# EAGLE board ESP12 Altherma-Panel (EAGLE 9.6.2)
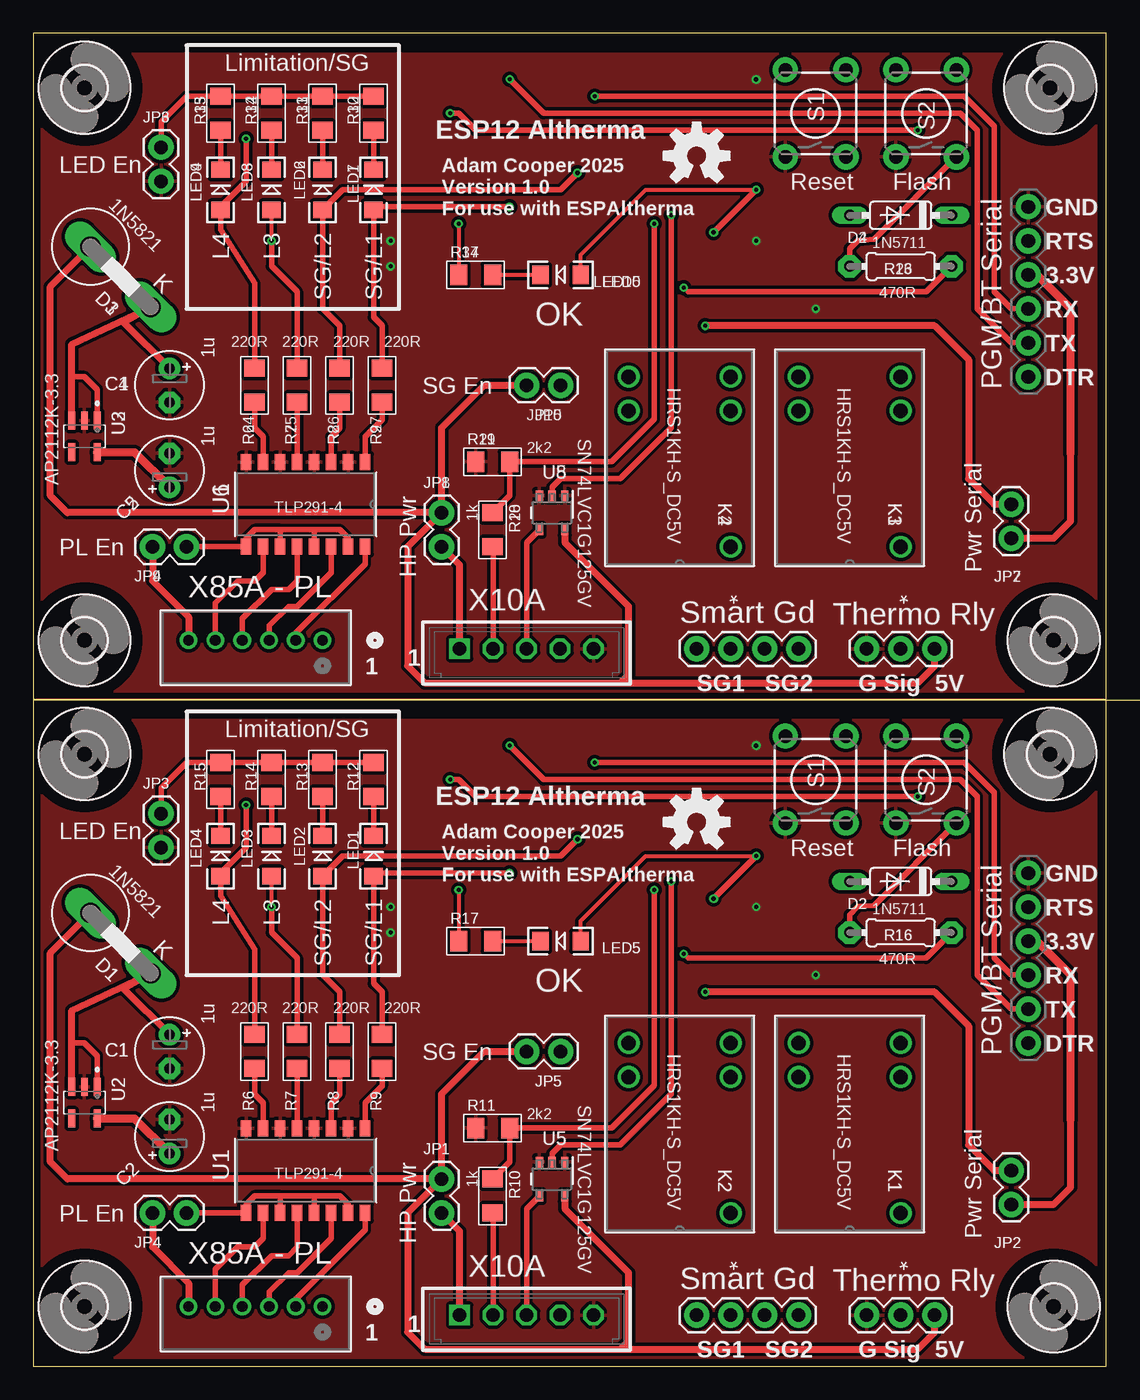
[diagram p0: board, top side]
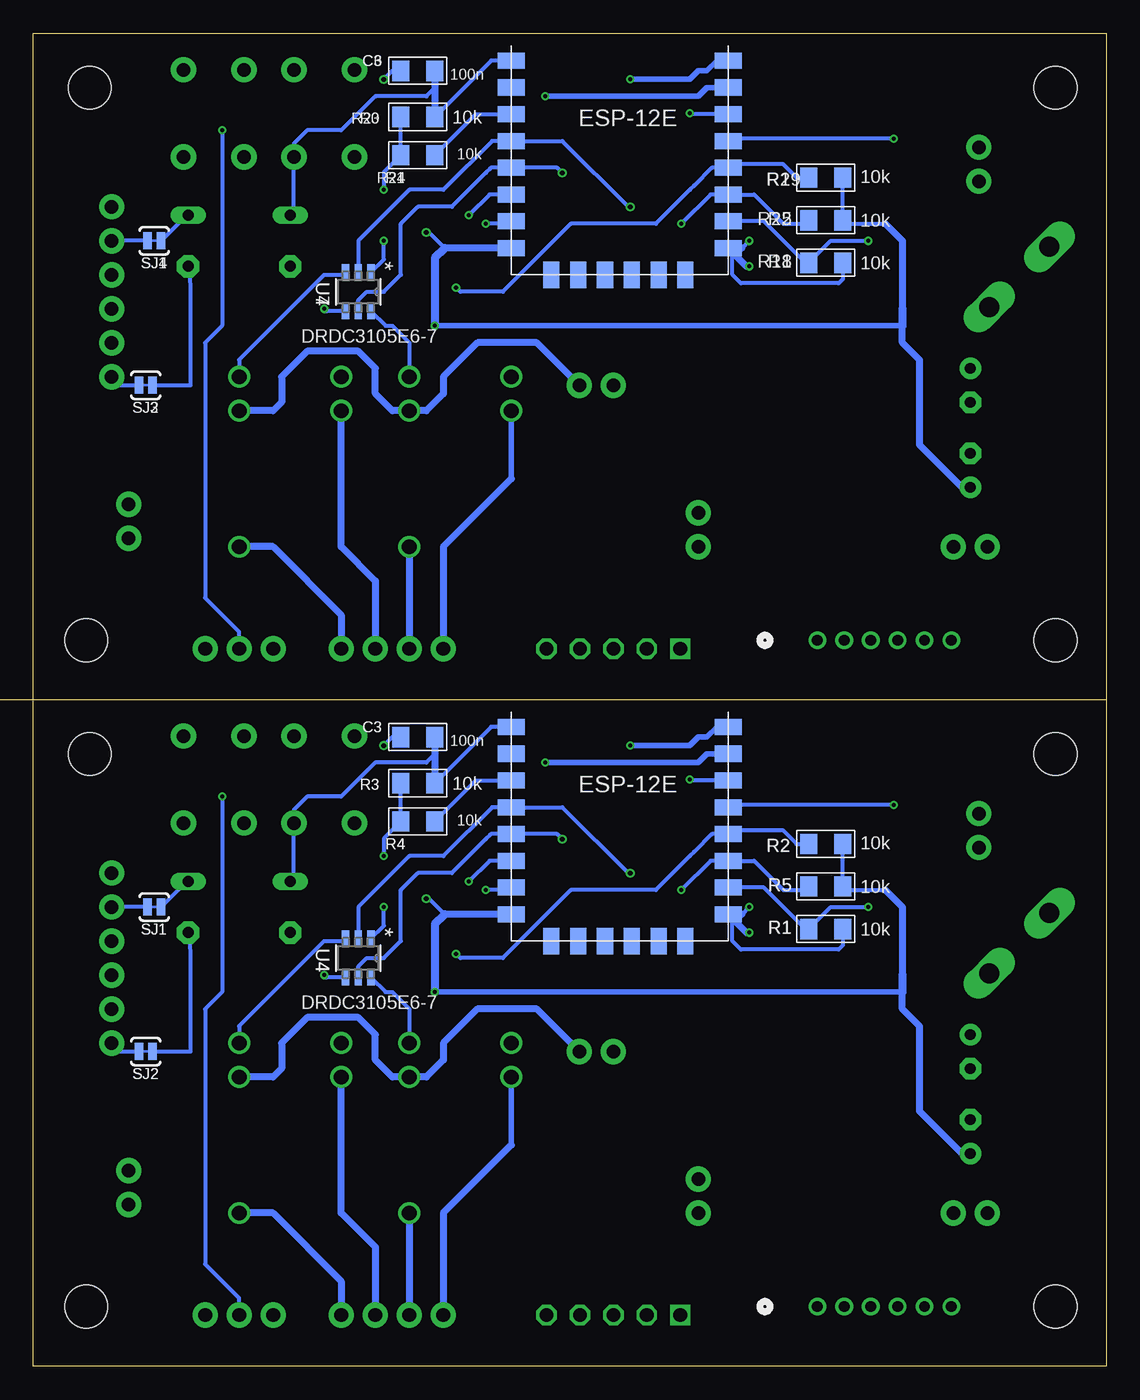
[diagram p1: board, bottom side, seen from below]

Size 80.14 x 99.56 mm. Coordinates in mm from the lower left corner, seen from the top.
Outline: 0,0 80.14,0 80.14,49.78 0,49.78 0,0
Outline: 0,49.78 80.14,49.78 80.14,99.56 0,99.56 0,49.78
Copper layers (1*16): Top 0.035mm / dielectric 1.5mm / Bottom 0.035mm
Design rules "Seeed Fusion_eagle_rule_v1.1": minimum track width 6mil, minimum drill 12mil, track to track 6mil, track to pad 6mil, pad to pad 6mil, via to via 6mil, smd to smd 0mil, copper to edge 10mil, drill to drill 10mil, minimum pad ring 10mil, minimum via ring 6mil, stop-mask expansion 2mil, vias tented up to drill 100mil, thermal gap 10mil
Milling: 1 lines

## Footprints (pad centres in the part's own frame; a part is rotated, then mirrored left to right if it is on the bottom)
E2,5-5 = drill 0.813 pad 1.6: + -1.27,0 | drill 0.813 pad 1.6 octagon: - 1.27,0
1206 = smd 1.27 x 1.524: 1 -1.27,0; 2 1.27,0
1X06-KIT = drill 1.016 pad 1.88: 1 0,0; 2 2.54,0; 3 5.08,0; 4 7.62,0; 5 10.16,0; 6 12.7,0
CONN_B06B-PASK_JST = drill 0.813 pad 1.321: 1 0,0; 2 2.007,0; 3 3.988,0; 4 5.994,0; 5 8.001,0; 6 10.008,0
B5B-EH-A = drill 1.016 square: 1 -5,0 | drill 1.016 octagon: 2 -2.5,0; 3 0,0; 4 2.5,0; 5 5,0
1X03 = drill 1.016 pad 1.88: 1 0,0; 2 2.54,0; 3 5.08,0
1X04 = drill 1.016 pad 1.88: 1 0,0; 2 2.54,0; 3 5.08,0; 4 7.62,0
DO201-15 = drill 1.499 long: A 0,0; C -6.35,0
DO35-7 = drill 0.813 long: A 3.81,0; C -3.81,0
3,2 = hole 3.2: 0,0
1X02 = drill 1.016 pad 1.88: 1 0,0; 2 2.54,0
HRS1KH-S_DC5V_MTC = drill 1.092 pad 1.6: 1 0,0; 2 0,-10.16; 3 0,-12.7; 4 7.62,-12.7; 5 7.62,-10.16
LED-1206 = smd 1.2 x 1.4: A -1.5,0; C 1.5,0
0204/7 = drill 0.813 pad 1.676 octagon: 1 -3.81,0; 2 3.81,0
TACTILE-PTH = drill 1.016 pad 1.88: 1 -3.251,2.261; 2 3.251,2.261; 3 -3.251,-2.261; 4 3.251,-2.261
SJ_2S-TRACE = smd 0.635 x 1.27: 1 -0.508,0; 2 0.508,0
ESP8266-ESP12E0-NKE = smd 2 x 1.2: 1 -7.62,5.84; 2 -7.62,3.84; 3 -7.62,1.84; 4 -7.62,-0.16; 5 -7.62,-2.16; 6 -7.62,-4.16; 7 -7.62,-6.16; 8 -7.62,-8.16; 9 8.58,-8.16; 10 8.58,-6.16; 11 8.58,-4.16; 12 8.58,-2.16; 13 8.58,-0.16; 14 8.58,1.84; 15 8.58,3.84; 16 8.58,5.84 | smd 1.2 x 2: 17 -4.62,-10.16; 18 -2.62,-10.16; 19 -0.62,-10.16; 20 1.38,-10.16; 21 3.38,-10.16; 22 5.38,-10.16
SO16_TOS = smd 1.194 x 0.813: 1 -3.15,4.445; 2 -3.15,3.175; 3 -3.15,1.905; 4 -3.15,0.635; 5 -3.15,-0.635; 6 -3.15,-1.905; 7 -3.15,-3.175; 8 -3.15,-4.445; 9 3.15,-4.445; 10 3.15,-3.175; 11 3.15,-1.905; 12 3.15,-0.635; 13 3.15,0.635; 14 3.15,1.905; 15 3.15,3.175; 16 3.15,4.445
SOT95P285X140-5N = smd 1.35 x 0.6: 1 -1.185,0.95; 2 -1.185,0; 3 -1.185,-0.95; 4 1.185,-0.95; 5 1.185,0.95
SOT26-DI_DIO-M = smd 1.206 x 0.559: 1 -1.454,0.95; 2 -1.454,0; 3 -1.454,-0.95; 4 1.454,-0.95; 5 1.454,0; 6 1.454,0.95
DBV0005A_L = smd 0.8 x 0.55: 1 -1.275,0.95; 2 -1.275,0; 3 -1.275,-0.95; 4 1.275,-0.95; 5 1.275,0.95

## Placement (x,y rotation side)
C1  1u  [E2,5-5]  10.16,23.5 270 top
C2  1u  [E2,5-5]  10.16,17.14 90 top
C3  100n  [1206]  51.44,46.99 180 bottom
C4  1u  [E2,5-5]  10.16,73.27 270 top
C5  1u  [E2,5-5]  10.16,66.92 90 top
C6  100n  [1206]  51.44,96.77 180 bottom
CON1  PGM/BT Serial  [1X06-KIT]  74.3,36.83 270 top
CON2  X85A - PL  [CONN_B06B-PASK_JST]  21.59,4.45 180 top
CON3  X10A  [B5B-EH-A]  36.83,3.81 0 top
CON4  PGM/BT Serial  [1X06-KIT]  74.3,86.61 270 top
CON5  Thermo Rly  [1X03]  62.23,3.81 0 top
CON6  Thermo Rly  [1X03]  62.23,53.59 0 top
CON7  X10A  [B5B-EH-A]  36.83,53.59 0 top
CON8  X85A - PL  [CONN_B06B-PASK_JST]  21.59,54.22 180 top
CONN1  SG  [1X04]  49.53,53.59 0 top
CONN4  SG  [1X04]  49.53,3.81 0 top
D1  1N5821  [DO201-15]  4.26,33.84 135 top
D2  1N5711  [DO35-7]  64.77,36.2 180 top
D3  1N5821  [DO201-15]  4.26,83.62 135 top
D4  1N5711  [DO35-7]  64.77,85.97 180 top
H1  MOUNT-HOLE3.2  [3,2]  75.93,45.72 0 top
H2  MOUNT-HOLE3.2  [3,2]  3.81,4.45 0 top
H3  MOUNT-HOLE3.2  [3,2]  76.2,4.45 0 top
H4  MOUNT-HOLE3.2  [3,2]  3.81,45.72 0 top
H5  MOUNT-HOLE3.2  [3,2]  75.93,95.5 0 top
H6  MOUNT-HOLE3.2  [3,2]  3.81,54.22 0 top
H7  MOUNT-HOLE3.2  [3,2]  3.81,95.5 0 top
H8  MOUNT-HOLE3.2  [3,2]  76.2,54.22 0 top
JP1  HP Pwr  [1X02]  30.48,13.97 270 top
JP2  Pwr Serial  [1X02]  73.03,12.06 90 top
JP3  LED En  [1X02]  9.53,41.27 270 top
JP4  PL En  [1X02]  8.89,11.43 0 top
JP5  SG En  [1X02]  39.37,23.5 180 top
JP6  LED En  [1X02]  9.53,91.05 270 top
JP7  Pwr Serial  [1X02]  73.03,61.84 90 top
JP8  HP Pwr  [1X02]  30.48,63.75 270 top
JP9  PL En  [1X02]  8.89,61.21 0 top
JP10  SG En  [1X02]  39.37,73.27 180 top
K1  HRS1KH-S_DC5V  [HRS1KH-S_DC5V_MTC]  64.77,11.43 180 top
K2  HRS1KH-S_DC5V  [HRS1KH-S_DC5V_MTC]  52.07,11.43 180 top
K3  HRS1KH-S_DC5V  [HRS1KH-S_DC5V_MTC]  64.77,61.21 180 top
K4  HRS1KH-S_DC5V  [HRS1KH-S_DC5V_MTC]  52.07,61.21 180 top
LED1  [LED-1206]  25.4,38.1 90 top
LED2  [LED-1206]  21.59,38.1 90 top
LED3  [LED-1206]  17.78,38.1 90 top
LED4  [LED-1206]  13.97,38.1 90 top
LED5  [LED-1206]  39.37,31.75 180 top
LED6  [LED-1206]  21.59,87.88 90 top
LED7  [LED-1206]  25.4,87.88 90 top
LED8  [LED-1206]  17.78,87.88 90 top
LED9  [LED-1206]  13.97,87.88 90 top
LED10  [LED-1206]  39.37,81.53 180 top
LOGO1  OSHW-LOGOM  [OSHW-LOGO-M]  49.53,40.64 0 top
LOGO2  OSHW-LOGOM  [OSHW-LOGO-M]  49.53,90.42 0 top
R1  10k  [1206]  20.95,32.66 180 bottom
R2  10k  [1206]  20.95,39.01 0 bottom
R3  10k  [1206]  51.44,43.55 180 bottom
R4  10k  [1206]  51.44,40.69 180 bottom
R5  10k  [1206]  20.95,35.83 180 bottom
R6  220R  [1206]  16.51,23.5 90 top
R7  220R  [1206]  19.68,23.5 90 top
R8  220R  [1206]  22.86,23.5 90 top
R9  220R  [1206]  26.04,23.5 90 top
R10  1k  [1206]  34.29,12.7 270 top
R11  2k2  [1206]  34.29,17.78 0 top
R12  180R  [1206]  25.4,43.81 270 top
R13  180R  [1206]  21.59,43.81 270 top
R14  180R  [1206]  17.78,43.81 270 top
R15  180R  [1206]  13.97,43.81 270 top
R16  470R  [0204/7]  64.77,32.38 0 top
R17  180R  [1206]  33.02,31.75 0 top
R18  10k  [1206]  20.95,82.43 180 bottom
R19  10k  [1206]  20.95,88.78 0 bottom
R20  10k  [1206]  51.44,93.32 180 bottom
R21  10k  [1206]  51.44,90.47 180 bottom
R22  10k  [1206]  20.95,85.61 180 bottom
R23  470R  [0204/7]  64.77,82.16 0 top
R24  220R  [1206]  16.51,73.27 90 top
R25  220R  [1206]  19.68,73.27 90 top
R26  220R  [1206]  22.86,73.27 90 top
R27  220R  [1206]  26.04,73.27 90 top
R28  1k  [1206]  34.29,62.48 270 top
R29  2k2  [1206]  34.29,67.56 0 top
R30  180R  [1206]  25.4,93.59 270 top
R31  180R  [1206]  21.59,93.59 270 top
R32  180R  [1206]  17.78,93.59 270 top
R33  180R  [1206]  13.97,93.59 270 top
R34  180R  [1206]  33.02,81.53 0 top
S1  Reset  [TACTILE-PTH]  58.42,43.81 90 top
S2  Flash  [TACTILE-PTH]  66.67,43.81 90 top
S3  Reset  [TACTILE-PTH]  58.42,93.59 90 top
S4  Flash  [TACTILE-PTH]  66.67,93.59 90 top
SJ1  SOLDERJUMPERTRACE  [SJ_2S-TRACE]  71.12,34.29 180 bottom
SJ2  SOLDERJUMPERTRACE  [SJ_2S-TRACE]  71.75,23.5 180 bottom
SJ3  SOLDERJUMPERTRACE  [SJ_2S-TRACE]  71.75,73.27 180 bottom
SJ4  SOLDERJUMPERTRACE  [SJ_2S-TRACE]  71.12,84.07 180 bottom
SJR1  [ESP8266-ESP12E0-NKE]  36.83,41.91 0 bottom
SJR2  [ESP8266-ESP12E0-NKE]  36.83,91.69 0 bottom
U1  TLP291-4  [SO16_TOS]  20.32,14.61 270 top
U2  AP2112K-3.3  [SOT95P285X140-5N]  3.81,19.68 270 top
U3  AP2112K-3.3  [SOT95P285X140-5N]  3.81,69.46 270 top
U4  DRDC3105E6-7  [SOT26-DI_DIO-M]  55.88,30.48 270 bottom
U5  SN74LVC1G125GV  [DBV0005A_L]  38.73,13.97 270 top
U6  TLP291-4  [SO16_TOS]  20.32,64.38 270 top
U7  DRDC3105E6-7  [SOT26-DI_DIO-M]  55.88,80.26 270 bottom
U8  SN74LVC1G125GV  [DBV0005A_L]  38.73,63.75 270 top

## Library data of the parts
C1-C6 CON1 CON4 D1-D4 H1-H8 LED1-LED10 LOGO1 LOGO2 R1-R34 S1-S4 SJ1-SJ4 = Master 2016
CON2 CON8 = conn-jst-pa6; COPYRIGHT: Copyright (C) 2025 Ultra Librarian. All rights reserved.; MANUFACTURER_PART_NUMBER: B06B-PASK(LF)(SN); MFR_NAME: JST
CON3 CON7 = con-jst-eh
CON5 CON6 = SparkFun-Connectors; PROD_ID: XXX-00000
CONN1 CONN4 = SparkFun-Connectors; PROD_ID: CONN-09696
JP1-JP10 = SparkFun-Passives
K1-K4 = HRS1KH-S Relay; COPYRIGHT: Copyright (C) 2024 Ultra Librarian. All rights reserved.; MANUFACTURER_PART_NUMBER: HRS1KH-S DC5V; MFR_NAME: Multicomp
SJR1 SJR2 = esp12e
U1 U6 = TLP291-4; COPYRIGHT: Copyright (C) 2024 Ultra Librarian. All rights reserved.; MANUFACTURER_PART_NUMBER: TLP291-4(GB-TP,E); MFR_NAME: Toshiba Electronic Devices & Storage Corp.
U2 U3 = AP2112K-3.3TRG1; AVAILABILITY: Unavailable; DESCRIPTION: Linear Voltage Regulator IC 1 Output 600mA SOT-25; MF: Diodes Inc.; MP: AP2112K-3.3TRG1; PACKAGE: SOT-753 Diodes Inc.; PRICE: None
U4 U7 = DRDC3105E6; COPYRIGHT: Copyright (C) 2024 Ultra Librarian. All rights reserved.; MANUFACTURER_PART_NUMBER: DRDC3105E6-7; MFR_NAME: Diodes Inc
U5 U8 = 74LVC1G125GV; COPYRIGHT: Copyright (C) 2024 Ultra Librarian. All rights reserved.; MANUFACTURER_PART_NUMBER: SN74LVC1G125DBVR; MFR_NAME: Texas Instruments; REFDES: RefDes; TYPE: TYPE

## Nets
5V: CON5.3 D1.A JP1.1 JP5.2 U5.5
5V1: CON6.3 D3.A JP8.1 JP10.2 U8.5
5V_HP: CON3.1 JP1.2
5V_HP1: CON7.1 JP8.2
GND: C1.- C2.- C3.2 CON1.1 CON3.5 CON5.1 JP3.2 R1.1 R11.1 S1.1 S2.1 SJR1.9 U1.2 U1.4 U1.6 U1.8 U2.2 U4.1 U4.4 U5.1 U5.3
GND1: C4.- C5.- C6.2 CON4.1 CON6.1 CON7.5 JP6.2 R18.1 R29.1 S3.1 S4.1 SJR2.9 U3.2 U6.2 U6.4 U6.6 U6.8 U7.1 U7.4 U8.1 U8.3
GPIO0: R2.1 R16.2 SJ2.1 SJR1.12
GPIO1: LED9.A R24.2 SJR2.13
GPIO2: R5.2 R17.1 SJR1.11
GPIO3: CON6.2 SJR2.14
GPIO4: LED4.A R6.2 SJR1.13
GPIO5: CON5.2 SJR1.14
GPIO6: SJR2.6 U8.2
GPIO7: R28.1 R29.2 SJR2.7
GPIO8: LED6.A R26.2 SJR2.5 U7.5
GPIO9: R19.1 R23.2 SJ3.1 SJR2.12
GPIO10: R22.2 R34.1 SJR2.11
GPIO11: LED7.A R27.2 SJR2.4 U7.2
GPIO12: SJR1.6 U5.2
GPIO13: R10.1 R11.2 SJR1.7
GPIO14: LED2.A R8.2 SJR1.5 U4.5
GPIO15: LED3.A R1.2 R7.2 SJR1.10
GPIO16: LED1.A R9.2 SJR1.4 U4.2
GPIO17: LED8.A R18.2 R25.2 SJR2.10
N$1: R16.1 S2.3
N$2: R9.1 U1.1
N$3: CON2.3 U1.14
N$4: JP3.1 R12.1 R13.1 R14.1 R15.1
N$5: CON1.2 SJ1.2
N$6: JP5.1 K1.2 K2.2
N$7: LED3.C R14.2
N$8: C1.+ D1.C U2.1 U2.3
N$9: CON1.3 JP2.1
N$10: CON1.6 SJ2.2
N$11: CON2.5 U1.10
N$12: CON2.4 U1.12
N$13: CON2.2 U1.16
N$14: D2.C SJ1.1
N$15: LED4.C R15.2
N$16: R4.1 SJR1.3
N$17: R6.1 U1.7
N$18: R8.1 U1.3
N$19: R7.1 U1.5
N$20: CON3.3 U5.4
N$21: CON3.2 R10.2
N$22: CONN4.1 K2.5
N$23: CONN4.2 K2.1
N$24: CONN4.3 K1.5
N$25: CONN4.4 K1.1
N$26: K1.3 U4.3
N$27: CON2.6 JP4.1
N$28: LED5.C R17.2
N$29: K2.3 U4.6
N$30: R21.1 SJR2.3
N$31: R23.1 S4.3
N$32: C4.+ D3.C U3.1 U3.3
N$33: CON4.3 JP7.1
N$34: CON4.6 SJ3.2
N$35: CON4.2 SJ4.2
N$36: D4.C SJ4.1
N$37: CON8.5 U6.10
N$38: CON8.4 U6.12
N$39: LED1.C R12.2
N$40: LED2.C R13.2
N$41: CON8.3 U6.14
N$42: CON8.2 U6.16
N$43: R24.1 U6.7
N$44: R27.1 U6.1
N$45: R26.1 U6.3
N$46: R25.1 U6.5
N$47: CON7.3 U8.4
N$48: CON7.2 R28.2
N$49: CONN1.1 K4.5
N$50: CONN1.3 K3.5
N$51: CONN1.2 K4.1
N$52: CONN1.4 K3.1
N$53: K3.3 U7.3
N$54: K4.3 U7.6
N$55: JP6.1 R30.1 R31.1 R32.1 R33.1
N$56: LED8.C R32.2
N$57: LED9.C R33.2
N$58: LED7.C R30.2
N$59: LED6.C R31.2
N$60: CON8.6 JP9.1
N$61: JP10.1 K3.2 K4.2
N$62: LED10.C R34.2
RST: C3.1 D2.A R3.1 S1.3 SJR1.1
RST1: C6.1 D4.A R20.1 S3.3 SJR2.1
RXD: CON1.4 SJR1.15
RXD1: CON4.4 SJR2.15
TXD: CON1.5 SJR1.16
TXD1: CON4.5 SJR2.16
VCC: C2.+ JP2.2 LED5.A R2.2 R3.2 R4.2 R5.1 SJR1.8 U2.5
VCC1: C5.+ JP7.2 LED10.A R19.2 R20.2 R21.2 R22.1 SJR2.8 U3.5
X85_GND: JP4.2 U1.9 U1.11 U1.13 U1.15
X85_GND1: JP9.2 U6.9 U6.11 U6.13 U6.15

## Tracks (layer width: path | path; a pad name or v marks a point on that pad's centre or on a via)
5V
  Top 0.508: JP1.1 2.54,13.97 1.27,15.24 1.27,30.85 D1.A | JP1.1 27.94,11.43 27.94,2.54 29.21,1.27 43.81,1.27 | 43.81,1.27 44.45,1.91 44.45,6.99 39.69,11.75 U5.5 | 43.81,1.27 66.04,1.27 67.31,2.54 CON5.3 | JP1.1 30.48,20.32 33.66,23.5 JP5.2
5V1
  Top 0.508: JP8.1 2.54,63.75 1.27,65.02 1.27,80.63 D3.A | JP8.1 27.94,61.21 27.94,52.32 29.21,51.05 43.81,51.05 | 43.81,51.05 44.45,51.68 44.45,56.76 39.69,61.53 U8.5 | 43.81,51.05 66.04,51.05 67.31,52.32 CON6.3 | JP8.1 30.48,70.1 33.66,73.27 JP10.2
5V_HP
  Top 0.508: CON3.1 31.83,10.08 JP1.2
5V_HP1
  Top 0.508: CON7.1 31.83,59.86 JP8.2
GND  (via drill 0.3 pad 0.61, 0.35)
  Bottom 0.305: SJR1.9 27.94,33.75 27.94,31.75 27.3,31.11 20,31.11 19.68,31.43 R1.1 | 27.21,33.75 v26.67,34.29 | 26.89,32.38 v26.67,32.38 | U4.1 53.98,32.89 v53.98,34.29 | U4.4 58.24,29.03 v58.42,29.21 | C3.2 53.34,46.99 v53.98,46.35
  Bottom 0.508: 27.94,33.75 27.21,33.75 | SJR1.9 26.89,32.38
  pour Top (isolate 0.254): 0.64,0.64 0.64,48.26 79.38,48.26 79.38,0.64
GND1  (via drill 0.3 pad 0.61, 0.35)
  Bottom 0.305: SJR2.9 27.94,83.53 27.94,81.53 27.3,80.89 20,80.89 19.68,81.21 R18.1 | 27.21,83.53 v26.67,84.07 | 26.89,82.16 v26.67,82.16 | U7.1 53.98,82.67 v53.98,84.07 | U7.4 58.24,78.81 v58.42,78.99 | C6.2 53.34,96.77 v53.98,96.13
  Bottom 0.508: 27.94,83.53 27.21,83.53 | SJR2.9 26.89,82.16
  pour Top (isolate 0.254): 0.64,50.41 0.64,98.04 79.38,98.04 79.38,50.41
GPIO0  (via drill 0.3 pad 0.61)
  Top 0.305: v48.58,30.8 48.9,30.48
  Top 0.406: R16.2 66.67,30.48 48.9,30.48
  Bottom 0.305: R2.1 23.13,39.01 24.13,40.01 28,40.01 SJR1.12 29.46,39.75 30.8,38.42 31.11,38.1 33.66,35.56 40.01,35.56 45.09,30.48 48.26,30.48 v48.58,30.8 | R16.2 68.43,30.96 68.43,23.5 SJ2.1
GPIO1  (via drill 0.3 pad 0.61)
  Top 0.305: 13.97,86.61 LED9.A
  Top 0.406: v15.88,91.69 15.88,88.51 13.97,86.61 | R24.2 16.51,80.89 13.97,84.89 LED9.A
  Bottom 0.305: v15.88,91.69 28.09,91.69 SJR2.13
GPIO2  (via drill 0.3 pad 0.61)
  Top 0.305: v31.75,35.56 R17.1
  Bottom 0.305: R5.2 22.5,35.56 24.13,35.56 26.32,37.75 SJR1.11 29.56,37.75 v31.75,35.56
GPIO3  (via drill 0.3 pad 0.61)
  Top 0.406: v31.11,93.59 31.75,93.59 33.02,92.32 v66.04,92.32
  Bottom 0.305: SJR2.14 31.18,93.53 v31.11,93.59 | v66.04,92.32 66.04,77.72 67.31,76.45 67.31,57.4 64.77,54.86 CON6.2
GPIO4  (via drill 0.3 pad 0.61)
  Top 0.305: 13.97,36.83 LED4.A
  Top 0.406: v15.88,41.91 15.88,38.73 13.97,36.83 | R6.2 16.51,31.11 13.97,35.11 LED4.A
  Bottom 0.305: v15.88,41.91 28.09,41.91 SJR1.13
GPIO5  (via drill 0.3 pad 0.61)
  Top 0.406: v31.11,43.81 31.75,43.81 33.02,42.55 v66.04,42.55
  Bottom 0.305: SJR1.14 31.18,43.75 v31.11,43.81 | v66.04,42.55 66.04,27.94 67.31,26.67 67.31,7.62 64.77,5.08 CON5.2
GPIO6  (via drill 0.3 pad 0.61)
  Top 0.406: U8.2 38.73,65.65 39.37,66.29 43.81,66.29 47.62,70.1 v47.62,85.97
  Bottom 0.305: SJR2.6 46.07,87.53 v47.62,85.97
GPIO7  (via drill 0.3 pad 0.61)
  Top 0.406: R28.1 35.56,65.02 R29.2 43.18,67.56 46.35,70.73 v46.35,85.34
  Bottom 0.305: SJR2.7 44.64,85.34 v46.35,85.34
GPIO8  (via drill 0.35)
  Top 0.406: R26.2 22.86,77.72 21.59,78.99 LED6.A 23.09,87.88 39.37,87.88 v40.64,89.15
  Bottom 0.305: U7.5 55.88,79.62 55.24,80.26 53.98,80.26 52.7,81.53 52.7,85.34 51.44,86.61 48.9,86.61 46.35,89.15 46.04,89.47 45.98,89.53 SJR2.5 41.02,89.53 v40.64,89.15
GPIO9  (via drill 0.3 pad 0.61)
  Top 0.305: v48.58,80.58 48.9,80.26
  Top 0.406: R23.2 66.67,80.26 48.9,80.26
  Bottom 0.305: R19.1 23.13,88.78 24.13,89.78 28,89.78 SJR2.12 29.46,89.53 30.8,88.2 31.11,87.88 33.66,85.34 40.01,85.34 45.09,80.26 48.26,80.26 v48.58,80.58 | R23.2 68.43,80.74 68.43,73.27 SJ3.1
GPIO10  (via drill 0.3 pad 0.61)
  Top 0.305: v31.75,85.34 R34.1
  Bottom 0.305: R22.2 22.5,85.34 24.13,85.34 26.32,87.53 SJR2.11 29.56,87.53 v31.75,85.34
GPIO11  (via drill 0.35)
  Top 0.305: LED7.A 25.63,86.61
  Top 0.406: 25.63,86.61 v35.56,86.61 | R27.2 26.04,77.72 25.4,78.35 LED7.A
  Bottom 0.305: U7.2 55.88,84.07 52.07,87.88 49.53,87.88 45.88,91.53 SJR2.4 40.64,91.53 35.72,86.61 v35.56,86.61
GPIO12  (via drill 0.3 pad 0.61)
  Top 0.406: U5.2 38.73,15.88 39.37,16.51 43.81,16.51 47.62,20.32 v47.62,36.2
  Bottom 0.305: SJR1.6 46.07,37.75 v47.62,36.2
GPIO13  (via drill 0.3 pad 0.61)
  Top 0.406: R10.1 35.56,15.24 R11.2 43.18,17.78 46.35,20.95 v46.35,35.56
  Bottom 0.305: SJR1.7 44.64,35.56 v46.35,35.56
GPIO14  (via drill 0.35)
  Top 0.406: R8.2 22.86,27.94 21.59,29.21 LED2.A 23.09,38.1 39.37,38.1 v40.64,39.37
  Bottom 0.305: U4.5 55.88,29.84 55.24,30.48 53.98,30.48 52.7,31.75 52.7,35.56 51.44,36.83 48.9,36.83 46.35,39.37 46.04,39.69 45.98,39.75 SJR1.5 41.02,39.75 v40.64,39.37
GPIO15  (via drill 0.3 pad 0.61)
  Top 0.305: v17.78,34.29 LED3.A
  Top 0.406: R7.2 19.68,30.48 17.78,32.38 v17.78,34.29
  Bottom 0.305: SJR1.10 25.59,35.75 22.5,32.66 R1.2 20.59,34.29 v17.78,34.29
GPIO16  (via drill 0.35)
  Top 0.305: LED1.A 25.63,36.83
  Top 0.406: 25.63,36.83 v35.56,36.83 | R9.2 26.04,27.94 25.4,28.57 LED1.A
  Bottom 0.305: U4.2 55.88,34.29 52.07,38.1 49.53,38.1 45.88,41.75 SJR1.4 40.64,41.75 35.72,36.83 v35.56,36.83
GPIO17  (via drill 0.3 pad 0.61)
  Top 0.305: v17.78,84.07 LED8.A
  Top 0.406: R25.2 19.68,80.26 17.78,82.16 v17.78,84.07
  Bottom 0.305: SJR2.10 25.59,85.53 22.5,82.43 R18.2 20.59,84.07 v17.78,84.07
N$1
  Top 0.406: R16.1 60.96,33.72 61.56,34.32 62.8,34.43 S2.3
N$2
  Top 0.406: R9.1 26.04,20.93 24.77,19.66 U1.1
N$3
  Top 0.406: CON2.3 17.6,5.54 19.05,6.99 19.68,6.99 22.23,9.53 U1.14
N$4
  Top 0.406: JP3.1 9.53,43.18 11.43,45.09 R15.1 R14.1 R13.1 R12.1
N$5
  Bottom 0.305: SJ1.2 CON1.2
N$6
  Bottom 0.508: JP5.1 42.55,26.67 46.99,26.67 49.53,24.13 49.53,22.86 50.8,21.59 K2.2 53.34,21.59 54.61,22.86 54.61,24.77 55.88,26.04 59.69,26.04 61.59,24.13 61.59,22.23 62.23,21.59 K1.2
N$7
  Top 0.406: R14.2 LED3.C
N$8
  Top 0.406: U2.1 4.76,23.18 3.81,24.13 2.86,24.13
  Top 0.508: U2.3 2.86,24.13 2.86,26.55 D1.C 6.75,28.18 C1.+
N$9
  Top 0.305: CON1.3 74.93,31.75
  Top 0.508: JP2.1 76.2,12.06 77.47,13.34 77.47,18.41
  Top 0.61: 74.93,31.75 77.47,29.21 77.47,18.41
N$10
  Bottom 0.305: CON1.6 73.66,23.5 SJ2.2
N$11
  Top 0.406: CON2.5 13.59,7.24 15.24,8.89 16.51,8.89 17.14,9.53 U1.10
N$12
  Top 0.406: CON2.4 15.6,6.07 17.78,8.26 19.05,8.26 19.68,8.89 U1.12
N$13
  Top 0.305: CON2.2 19.58,4.98
  Top 0.406: 19.58,4.98 24.77,10.16 U1.16
N$14
  Bottom 0.305: SJ1.1 68.71,36.2 D2.C
N$15
  Top 0.406: R15.2 LED4.C
N$16
  Bottom 0.305: R4.1 47.1,43.75 SJR1.3
N$17
  Top 0.406: R6.1 16.51,20.3 17.14,19.66 U1.7
N$18
  Top 0.406: R8.1 22.86,20.3 22.23,19.66 U1.3
N$19
  Top 0.406: R7.1 U1.5
N$20
  Top 0.406: U5.4 36.83,11.74 CON3.3
N$21
  Top 0.305: 34.33,11.39 R10.2
  Top 0.406: CON3.2 34.33,11.39
N$22
  Bottom 0.406: 44.45,16.51 K2.5
  Bottom 0.508: 44.45,16.51 49.53,11.43 CONN4.1
N$23
  Bottom 0.508: K2.1 CONN4.2
N$24
  Bottom 0.508: K1.5 57.15,11.43 54.61,8.89 CONN4.3
N$25
  Bottom 0.508: K1.1 62.23,11.43 57.15,6.35 CONN4.4
N$26
  Bottom 0.305: K1.3 64.77,25.4 58.42,31.75 57.01,31.75 U4.3
N$27
  Top 0.508: JP4.1 8.89,8.89 11.58,6.2 CON2.6
N$28
  Top 0.305: R17.2 LED5.C
N$29
  Bottom 0.305: U4.6 53.84,27.94 53.34,27.94 52.07,26.67 K2.3
N$30
  Bottom 0.305: R21.1 47.1,93.53 SJR2.3
N$31
  Top 0.406: R23.1 60.96,83.5 61.56,84.1 62.8,84.21 S4.3
N$32
  Top 0.406: U3.1 4.76,72.96 3.81,73.91 2.86,73.91
  Top 0.508: U3.3 2.86,73.91 2.86,76.33 D3.C 6.75,77.96 C4.+
N$33
  Top 0.305: CON4.3 74.93,81.53
  Top 0.508: JP7.1 76.2,61.84 77.47,63.11 77.47,68.19
  Top 0.61: 74.93,81.53 77.47,78.99 77.47,68.19
N$34
  Bottom 0.305: CON4.6 73.66,73.27 SJ3.2
N$35
  Bottom 0.305: SJ4.2 CON4.2
N$36
  Bottom 0.305: SJ4.1 68.71,85.97 D4.C
N$37
  Top 0.406: CON8.5 13.59,57.02 15.24,58.67 16.51,58.67 17.14,59.3 U6.10
N$38
  Top 0.406: CON8.4 15.6,55.85 17.78,58.03 19.05,58.03 19.68,58.67 U6.12
N$39
  Top 0.406: R12.2 LED1.C
N$40
  Top 0.406: R13.2 LED2.C
N$41
  Top 0.406: CON8.3 17.6,55.32 19.05,56.76 19.68,56.76 22.23,59.3 U6.14
N$42
  Top 0.305: CON8.2 19.58,54.76
  Top 0.406: 19.58,54.76 24.77,59.94 U6.16
N$43
  Top 0.406: R24.1 16.51,70.07 17.14,69.44 U6.7
N$44
  Top 0.406: R27.1 26.04,70.71 24.77,69.44 U6.1
N$45
  Top 0.406: R26.1 22.86,70.07 22.23,69.44 U6.3
N$46
  Top 0.406: R25.1 U6.5
N$47
  Top 0.406: U8.4 36.83,61.52 CON7.3
N$48
  Top 0.305: 34.33,61.17 R28.2
  Top 0.406: CON7.2 34.33,61.17
N$49
  Bottom 0.406: 44.45,66.29 K4.5
  Bottom 0.508: 44.45,66.29 49.53,61.21 CONN1.1
N$50
  Bottom 0.508: K3.5 57.15,61.21 54.61,58.67 CONN1.3
N$51
  Bottom 0.508: K4.1 CONN1.2
N$52
  Bottom 0.508: K3.1 62.23,61.21 57.15,56.13 CONN1.4
N$53
  Bottom 0.305: K3.3 64.77,75.18 58.42,81.53 57.01,81.53 U7.3
N$54
  Bottom 0.305: U7.6 53.84,77.72 53.34,77.72 52.07,76.45 K4.3
N$55
  Top 0.406: JP6.1 9.53,92.96 11.43,94.86 R33.1 R32.1 R31.1 R30.1
N$56
  Top 0.406: R32.2 LED8.C
N$57
  Top 0.406: R33.2 LED9.C
N$58
  Top 0.406: R30.2 LED7.C
N$59
  Top 0.406: R31.2 LED6.C
N$60
  Top 0.508: JP9.1 8.89,58.67 11.58,55.98 CON8.6
N$61
  Bottom 0.508: JP10.1 42.55,76.45 46.99,76.45 49.53,73.91 49.53,72.64 50.8,71.37 K4.2 53.34,71.37 54.61,72.64 54.61,74.54 55.88,75.81 59.69,75.81 61.59,73.91 61.59,72 62.23,71.37 K3.2
N$62
  Top 0.305: R34.2 LED10.C
RST
  Bottom 0.305: SJR1.1 45.96,47.75 R3.1 | 50.16,45.72 50.8,45.09 54.61,45.09 57.15,42.55 59.69,42.55 60.68,41.55 S1.3 60.68,36.47 D2.A
  Bottom 0.508: C3.1 50.16,45.72 R3.1
RST1
  Bottom 0.305: SJR2.1 45.96,97.53 R20.1 | 50.16,95.5 50.8,94.86 54.61,94.86 57.15,92.32 59.69,92.32 60.68,91.33 S3.3 60.68,86.25 D4.A
  Bottom 0.508: C6.1 50.16,95.5 R20.1
RXD  (via drill 0.3 pad 0.61)
  Top 0.406: v41.91,45.09 69.53,45.09 71.75,42.86 71.75,30.48 73.03,29.21 CON1.4
  Bottom 0.305: SJR1.15 28.28,45.72
  Bottom 0.406: 28.28,45.72 29.84,45.72 30.48,45.09 v41.91,45.09
RXD1  (via drill 0.3 pad 0.61)
  Top 0.406: v41.91,94.86 69.53,94.86 71.75,92.64 71.75,80.26 73.03,78.99 CON4.4
  Bottom 0.305: SJR2.15 28.28,95.5
  Bottom 0.406: 28.28,95.5 29.84,95.5 30.48,94.86 v41.91,94.86
TXD  (via drill 0.3 pad 0.61)
  Top 0.406: CON1.5 73.03,26.67 70.48,29.21 70.48,42.55 69.22,43.81 38.1,43.81 v35.56,46.35
  Bottom 0.305: 29.09,47.75 SJR1.16
  Bottom 0.406: v35.56,46.35 31.11,46.35 30.48,46.99 29.84,46.99 29.09,47.75
TXD1  (via drill 0.3 pad 0.61)
  Top 0.406: CON4.5 73.03,76.45 70.48,78.99 70.48,92.32 69.22,93.59 38.1,93.59 v35.56,96.13
  Bottom 0.305: 29.09,97.53 SJR2.16
  Bottom 0.406: v35.56,96.13 31.11,96.13 30.48,96.77 29.84,96.77 29.09,97.53
VCC  (via drill 0.3 pad 0.61, 0.35)
  Top 0.305: LED5.A 40.87,33.25 45.72,38.1 v53.98,38.1
  Top 0.406: v50.8,34.92 v53.98,38.1
  Top 0.508: v50.16,27.94 67.31,27.94 69.85,25.4 69.85,16.51 71.75,14.61 JP2.2
  Top 0.61: C2.+ 7.54,18.5 U2.5
  Bottom 0.305: 16.51,35.56 19.41,35.56 R5.1 R2.2 | R3.2 R4.2 53.98,39.42 v53.98,38.1 | 49.44,33.75 50.61,34.92 v50.8,34.92
  Bottom 0.406: v50.16,27.94 15.24,27.94
  Bottom 0.508: 16.51,35.56 15.24,34.29 15.24,29.21 | SJR1.8 49.44,33.75 | 15.24,27.94 15.24,26.67 13.97,25.4 13.97,19.05 10.79,15.88 C2.+
  Bottom 0.61: 15.24,29.21 15.24,27.94 | v50.16,27.94 50.16,33.02 49.44,33.75
VCC1  (via drill 0.3 pad 0.61, 0.35)
  Top 0.305: LED10.A 40.87,83.03 45.72,87.88 v53.98,87.88
  Top 0.406: v50.8,84.7 v53.98,87.88
  Top 0.508: v50.16,77.72 67.31,77.72 69.85,75.18 69.85,66.29 71.75,64.38 JP7.2
  Top 0.61: C5.+ 7.54,68.28 U3.5
  Bottom 0.305: 16.51,85.34 19.41,85.34 R22.1 R19.2 | R20.2 R21.2 53.98,89.2 v53.98,87.88 | 49.44,83.53 50.61,84.7 v50.8,84.7
  Bottom 0.406: v50.16,77.72 15.24,77.72
  Bottom 0.508: 16.51,85.34 15.24,84.07 15.24,78.99 | SJR2.8 49.44,83.53 | 15.24,77.72 15.24,76.45 13.97,75.18 13.97,68.83 10.79,65.65 C5.+
  Bottom 0.61: 15.24,78.99 15.24,77.72 | v50.16,77.72 50.16,82.8 49.44,83.53
X85_GND
  Top 0.305: U1.15 23.5,12.06 | 15.85,11.43 U1.9 15.88,12.06
  Top 0.406: 18.41,12.7 16.51,12.7 15.88,12.06 | 18.41,12.7 20.95,12.7 | 20.95,12.7 22.86,12.7 23.5,12.06 | U1.13 20.95,12.7 | U1.11 18.41,12.7 | 15.85,11.43 JP4.2
X85_GND1
  Top 0.305: U6.15 23.5,61.84 | 15.85,61.21 U6.9 15.88,61.84
  Top 0.406: 18.41,62.48 16.51,62.48 15.88,61.84 | 18.41,62.48 20.95,62.48 | 20.95,62.48 22.86,62.48 23.5,61.84 | U6.13 20.95,62.48 | U6.11 18.41,62.48 | 15.85,61.21 JP9.2

## Text on the board
tPlace: Limitation/SG | ESP12 Altherma | GND | Adam Cooper 2025 / Version 1.0 / For use with ESPAltherma | L4 | L3 | SG/L2 | SG/L1 | RTS | 3.3V | RX | OK | TX | DTR | Smart Gd | 1 | 1 | SG1 | SG2 | G | Sig | 5V | Limitation/SG | ESP12 Altherma | GND | Adam Cooper 2025 / Version 1.0 / For use with ESPAltherma | L4 | L3 | SG/L2 | SG/L1 | RTS | 3.3V | RX | OK | TX | DTR | Smart Gd | 1 | 1 | SG1 | SG2 | G | Sig | 5V
Milling: v-score
_tNames: R15 | R14 | R13 | R12 | JP3 | S1 | S2 | LED2 | LED1 | LED4 | LED3 | D2 | R17 | R16 | LED5 | D1 | C1 | U2 | JP5 | R6 | R7 | R8 | R9 | R11 | JP1 | U5 | C2 | U1 | R10 | K2 | K1 | JP4 | JP2 | R15 | R14 | R13 | R12 | JP3 | S1 | S2 | LED2 | LED1 | LED4 | LED3 | D2 | R17 | LED5 | R16 | D1 | C1 | U2 | JP5 | R6 | R7 | R8 | R9 | R11 | U5 | JP1 | C2 | R10 | K2 | K1 | U1 | JP2 | JP4
_bNames: C3 | R3 | R4 | R2 | R5 | R1 | SJ1 | U4 | SJ2 | C3 | R3 | R4 | R2 | R5 | R1 | SJ1 | U4 | SJ2